# Altium PCB PCB1.PcbDoc
Units mil, origin at the board's own origin, x right, y up, seen from the top; angles counter-clockwise.
Board outline 5000 x 2500 mil, 2 copper layers (Top Layer, Bottom Layer); 38 components, 55 nets, 182 pads, 13 vias.
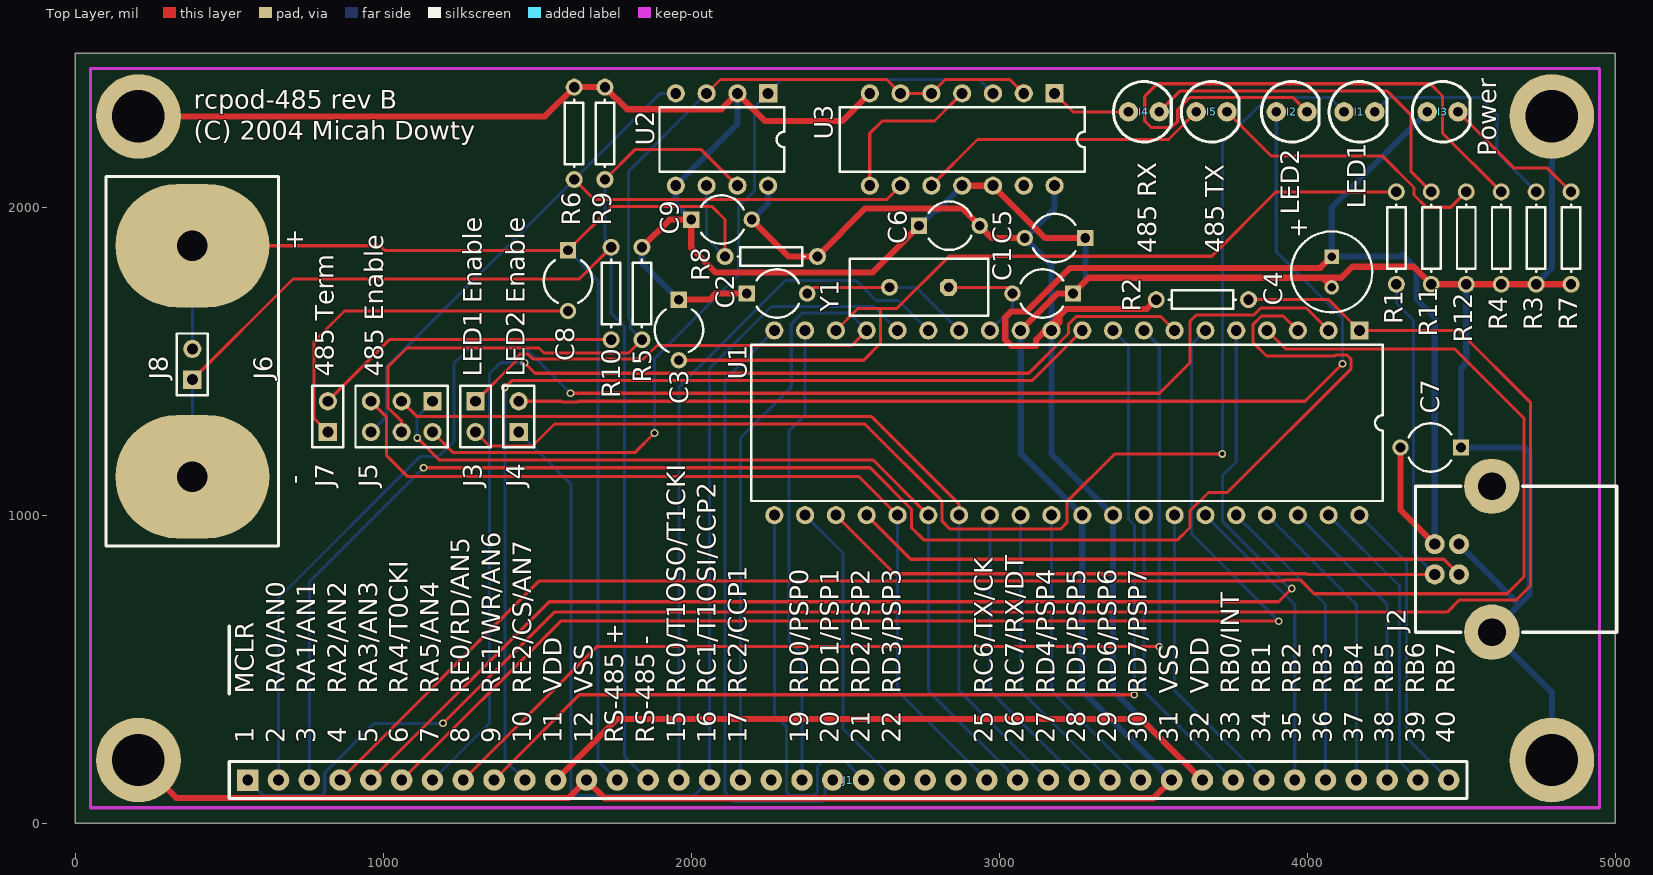
[diagram p0: Top Layer view]
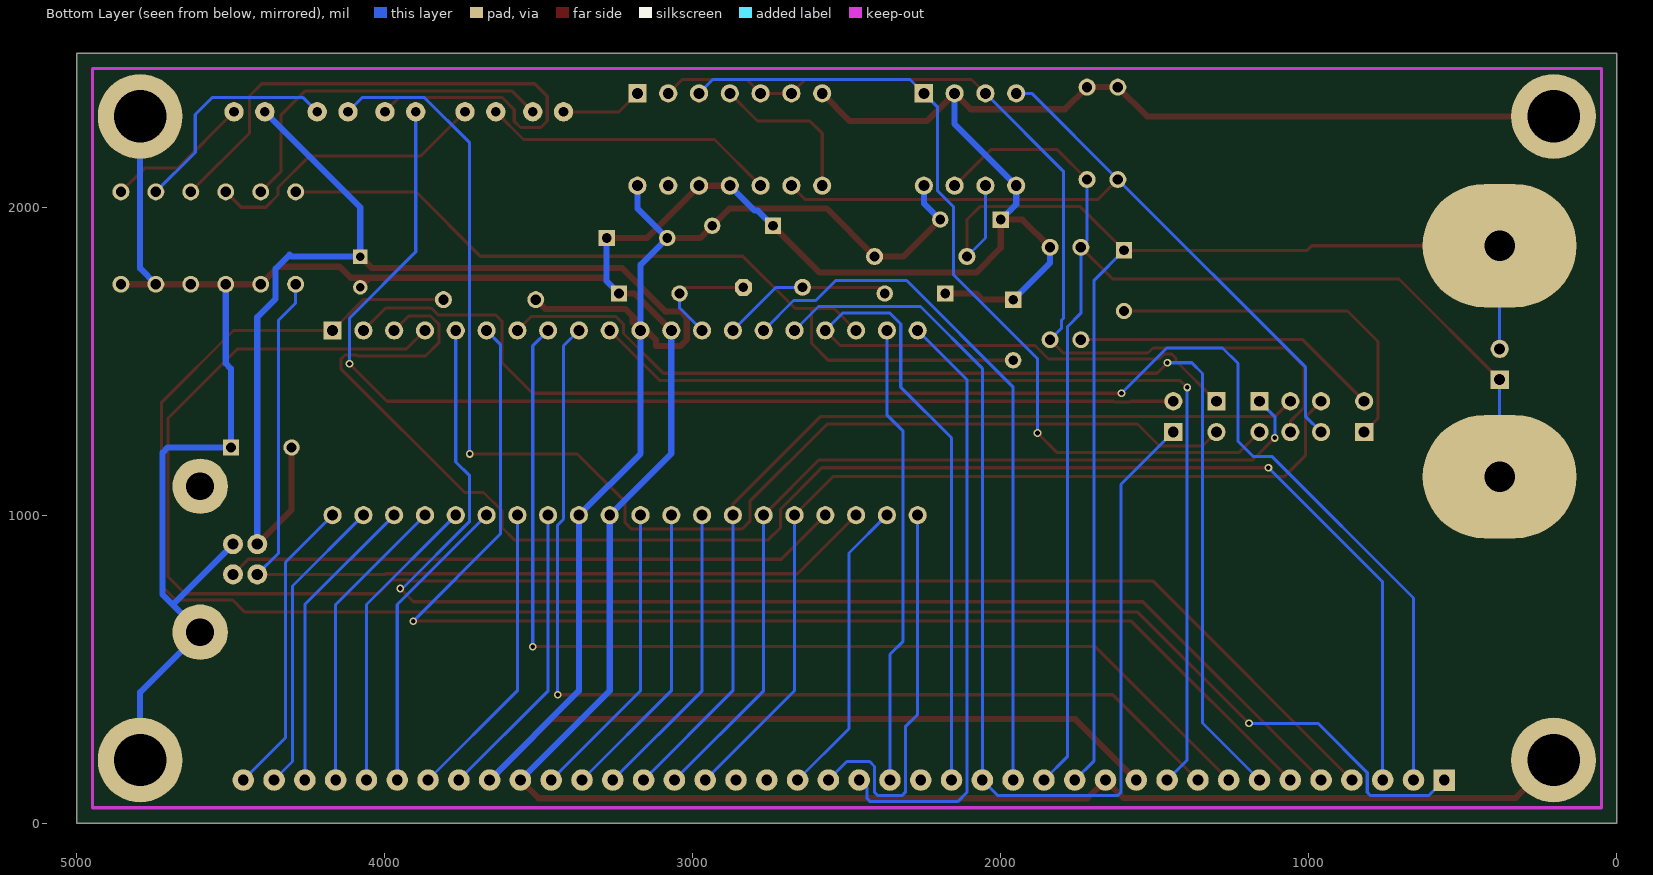
[diagram p1: Bottom Layer view, seen from below]

## Layer stack, top to bottom
Top Layer: signal copper 1.4
Dielectric: dielectric 12.6, FR-4, Dk 4.8
Bottom Layer: signal copper 1.4

## Board outline
0,0 5000,0 5000,2500 0,2500

## Design rules (kind name [scope] priority, off if disabled: settings)
Clearance [All] p1: gap=10
ComponentClearance [All] p1: gap=10 collisioncheckmode=0
PolygonConnect [All] p1: connectstyle=Relief reliefconductorwidth=10 reliefentries=4 polygonreliefangle="90 Angle"
RoomDefinition Sheet1 [InComponentClass('Sheet1')] p1: confinementstyle=ConfineIn formatcopy=TRUE outline 3940,6840 7320,6840 7320,7500 3940,7500
RoutingLayers [All] p1: top layer=Horizontal bottom layer=Vertical
RoutingVias [All] p1: holewidth=15 width=25 viastyle="Through Hole" minholewidth=15 minwidth=25 maxholewidth=15 maxwidth=25
SolderMaskExpansion [All] p1: expansion=4
TestPointUsage [All] p1: valid=0 allowmultiple=FALSE
Testpoint [All] p1: side=15 testpointundercomponent=TRUE minsize=40 maxsize=100 preferedsize=60 minholesize=0 maxholesize=40 preferedholesize=32 testpointgrid=1 style=1023 order=-539222988
Width Width_power [(InNet('VCC') or InNet('GND'))] p1: maxlimit=20 minlimit=10 preferedwidth=10 toplayer_minwidth=20 toplayer_prefwidth=20 bottomlayer_minwidth=20 bottomlayer_prefwidth=20 minimp=50.000000 maximp=50.000000 favimp=50.000000
Width [All] p2: maxlimit=10 minlimit=10 preferedwidth=10
16 further rules are at their usual default settings.

## Components (designator, comment, footprint, x,y, rotation, side; value= is the part's Value field where it differs from the comment)
C1 "Cap2" CAPR5-4X5 3240,1720 r180 top
C2 "Cap2" CAPR5-4X5 2180,1720 r0 top
C3 "" CAPR5-4X5 1960,1700 r270 top
C4 "10uF" CAP-EE-1 4080,1940 r90 top
C5 "" CAPR5-4X5 3280,1900 r180 top
C6 "" CAPR5-4X5 2740,1940 r0 top
C7 "" CAPR5-4X5 4500,1220 r180 top
C8 "" CAPR5-4X5 1600,1860 r270 top
C9 "" CAPR5-4X5 2000,1960 r0 top
I1 "LED1" LED-1-UNBROKE 4170,2310 r90 top
I2 "LED2" LED-1-UNBROKE 3950,2310 r90 top
I3 "Power" LED-1-UNBROKE 4440,2310 r90 top
I4 "485 RX" LED-1-UNBROKE 3470,2310 r90 top
I5 "485 TX" LED-1-UNBROKE 3690,2310 r90 top
J1 "GPIO" HR40 560,40 r90 top (schematic designator JP1)
J2 "USB" USB-TYPEB 4600,620 r90 top (schematic designator J1)
J3 "LED1 Enable" HDR1X2 1300,1370 r270 top
J4 "LED2 Enable" HDR1X2 1440,1270 r90 top
J5 "485 Enable" HDR2X3_NOTEXT 1160,1370 r180 top
J6 "RS-485" RS485J 380,1500 r90 top
J7 "485 Term" HDR1X2 820,1270 r90 top
J8 "RS-485" HDR1X2 380,1440 r90 top
R1 "Res1" AXIAL-0.3 4290,1900 r270 top
R2 "Res1" AXIAL-0.3 3660,1700 r180 top
R3 "Res1" AXIAL-0.3 4743.86,1900 r270 top
R4 "Res1" AXIAL-0.3 4630.39,1900 r270 top
R5 "Res1" AXIAL-0.3 1840,1720 r270 top
R6 "Res1" AXIAL-0.3 1620,2240 r270 top
R7 "" AXIAL-0.3 4857.32,1900 r270 top
R8 "" AXIAL-0.3 2260,1840 r180 top
R9 "" AXIAL-0.3 1720,2240 r90 top
R10 "" AXIAL-0.3 1740,1720 r90 top
R11 "" AXIAL-0.3 4403.46,1900 r270 top
R12 "" AXIAL-0.3 4516.93,1900 r270 top
U1 "PIC16C765" DIP-40 3220,1300 r180 top
U2 "MAX3082E" DIP-8 2100,2220 r180 top
U3 "MM74C02J" DIP-14 2880,2220 r180 top
Y1 "6 MHz" BCY-W2/E4.7 2740,1740 r180 top

## Footprints (in the part's own frame and the unit in brackets; to place one, negate y for a bottom-side part, rotate by r counter-clockwise, add the part's x,y. Pads: shape width x height; smd on the part's side, far side on the other; paste and mask are expansions set on the pad)
AXIAL-0.3 [mm]
  round 1.4 hole 0.85: 1(-3.81,0) 2(3.81,0)
  silkscreen extent -2.77,-0.76 2.77,0.76
BCY-W2/E4.7 [mm]
  oct 1.4x1.4 hole 0.8: 1(-2.44,0)
  round 1.4 hole 0.8: 2(2.44,0)
  silkscreen extent -5.7,-2.35 5.7,2.35
CAP-EE-1 [mm]
  rect 1.2x1.2 hole 0.7: 1(-2.54,0)
  round 1.2 hole 0.7: 2(-5.08,0)
  silkscreen extent -7.15,-3.34 -0.47,3.34
CAPR5-4X5 [mm]
  rect 1.35x1.35 hole 0.8: 1(0,0)
  round 1.35 hole 0.8: 2(5,0)
  silkscreen extent 0.81,-2 4.32,2
DIP-8 [mm]
  rect 1.5x1.5 hole 0.9: 1(-3.81,-3.81)
  round 1.5 hole 0.9: 2(-1.27,-3.81) 3(1.27,-3.81) 4(3.81,-3.81) 5(3.81,3.81) 6(1.27,3.81) 7(-1.27,3.81) 8(-3.81,3.81)
  silkscreen extent -5.15,-2.65 5.15,2.65
DIP-14 [mm]
  rect 1.5x1.5 hole 0.9: 1(-7.62,-3.81)
  round 1.5 hole 0.9: 2(-5.08,-3.81) 3(-2.54,-3.81) 4(0,-3.81) 5(2.54,-3.81) 6(5.08,-3.81) 7(7.62,-3.81) 8(7.62,3.81) 9(5.08,3.81) 10(2.54,3.81) 11(0,3.81) 12(-2.54,3.81) 13(-5.08,3.81) 14(-7.62,3.81)
  silkscreen extent -10.1,-2.65 10.1,2.65
DIP-40 [mm]
  rect 1.5x1.5 hole 0.9: 1(-24.13,-7.62)
  round 1.5 hole 0.9: 2(-21.59,-7.62) 3(-19.05,-7.62) 4(-16.51,-7.62) 5(-13.97,-7.62) 6(-11.43,-7.62) 7(-8.89,-7.62) 8(-6.35,-7.62) 9(-3.81,-7.62) 10(-1.27,-7.62) 11(1.27,-7.62) 12(3.81,-7.62) 13(6.35,-7.62) 14(8.89,-7.62) 15(11.43,-7.62) 16(13.97,-7.62) 17(16.51,-7.62) 18(19.05,-7.62) 19(21.59,-7.62) 20(24.13,-7.62) 21(24.13,7.62) 22(21.59,7.62) 23(19.05,7.62) 24(16.51,7.62) 25(13.97,7.62) 26(11.43,7.62) 27(8.89,7.62) 28(6.35,7.62) 29(3.81,7.62) 30(1.27,7.62) 31(-1.27,7.62) 32(-3.81,7.62) 33(-6.35,7.62) 34(-8.89,7.62) 35(-11.43,7.62) 36(-13.97,7.62) 37(-16.51,7.62) 38(-19.05,7.62) 39(-21.59,7.62) 40(-24.13,7.62)
  silkscreen extent -26.05,-6.45 26.05,6.45
HDR1X2 [mm]
  rect 1.5x1.5 hole 0.9: 1(0,0)
  round 1.5 hole 0.9: 2(2.54,0)
  silkscreen extent -1.27,-1.27 3.81,1.27
HDR2X3_NOTEXT [mm]
  rect 1.5x1.5 hole 0.9: 1(0,0)
  round 1.5 hole 0.9: 2(0,2.54) 3(2.54,0) 4(2.54,2.54) 5(5.08,0) 6(5.08,2.54)
  silkscreen extent -1.27,-1.27 6.35,3.81
HR40 [mil]
  rect 70x70 hole 35: 1(100,0)
  round 70 hole 35: 2(100,-100) 3(100,-200) 4(100,-300) 5(100,-400) 6(100,-500) 7(100,-600) 8(100,-700) 9(100,-800) 10(100,-900) 11(100,-1000) 12(100,-1100) 13(100,-1200) 14(100,-1300) 15(100,-1400) 16(100,-1500) 17(100,-1600) 18(100,-1700) 19(100,-1800) 20(100,-1900) 21(100,-2000) 22(100,-2100) 23(100,-2200) 24(100,-2300) 25(100,-2400) 26(100,-2500) 27(100,-2600) 28(100,-2700) 29(100,-2800) 30(100,-2900) 31(100,-3000) 32(100,-3100) 33(100,-3200) 34(100,-3300) 35(100,-3400) 36(100,-3500) 37(100,-3600) 38(100,-3700) 39(100,-3800) 40(100,-3900)
  silkscreen extent 40,-3960 600,60
LED-1-UNBROKE [mm]
  round 1.6 hole 0.8: 1(0,1.27) 2(0,-1.27)
  silkscreen extent -2.5,-2.27 2.5,2.5
RS485J [mil]
  oval 400x500 hole 100: 1(-375,0) 2(375,0)
  silkscreen extent -600,-280 600,280
USB-TYPEB [mil]
  round 65 hole 36.22: 1(286.22,185.43) 2(187.8,185.43) 3(187.8,106.69) 4(286.22,106.69)
  round 180 hole 90.55: 5(0,0) 5(474.02,0)
  silkscreen extent 0,-406 474,248

## Part data
C1 C2: "Capacitor"
C3 C5 C6 C7 C8 C9: library part Cap2, "Capacitor"
C4: library part "Cap Pol1", "Polarized Capacitor (Radial)"
I1: "Typical RED GaAs LED"
I2 I3 I4 I5: library part LED1, "Typical RED GaAs LED"
J1: library part MHDR2X20, "Header, 20-Pin, Dual row"
J2: library part "USB Type B", "Header, 4-Pin"
J3 J4 J6 J7 J8: library part MHDR1X2, "Header, 2-Pin"
J5: library part MHDR2X3, "Header, 3-Pin, Dual row"
R1 R2 R3 R4 R5 R6: "Resistor"
R7 R8 R9 R10 R11 R12: library part Res1, "Resistor"
U1: "EPROM-Based 8-Bit CMOS Microcontroller with USB"
U2: "+5V-Powered, RS-485 Driver/Receiver"
U3: library part MM74C00J, "Quad 2-Input NAND Gate"
Y1: library part XTAL, "Crystal Oscillator"

## Free pads (board coordinates)
  round 275 hole 170: 0(205,205) 0(205,2295) 0(4795,205) 0(4795,2295)

## Via types
v1: diameter 25, hole 15, Top Layer to Bottom Layer, 13 vias

## Nets (pads, with @x,y where several pads share a name; then routed paths per layer and width w, separated by ;. In a path a pad name is that pad's centre, name@x,y a point inside that pad or via, vN(x,y) a via of type N, cw(c..) or ccw(c..) an arc to the next point about the centre after c; other vN are vias at no path point)
GND: C1.1 C2.1 C3.1 C4.2 C5.1 C6.1 C7.1 C9.1 J1.12 J1.31 J2.4 J2.5@4600,620 pad.0 R3.2 R4.2 R5.1 R6.1 R7.2 R9.2 R11.2 R12.2 U1.12 U1.31 U2.2 U2.5 U3.7 U3.11 U3.12 | length 15309.7
  Top Layer w20: pad.0@205,205 328,82 1602,82 J1.12 1719,81 3501,81 J1.31 ; pad.0@205,2295 1525,2295 R6.1 R9.2 1792,2318 2098,2318 U2.2 2240,2280 2490,2280 U3.7 ; R5.1 1930,1960 C9.1 2000,1868 2080,1788 2588,1788 C6.1 ; C3.1 2060,1700 2080,1720 C2.1 ; U3.11 U3.12 3150,1900 C5.1 ; U1.12 3190,1720 C1.1 3291,1771 4049,1771 ; C4.2 4049,1771 ; R7.2 R3.2 R4.2 R12.2 R11.2 4346.46,1807 4147,1807 4111,1771 4080,1771 4049,1771
  Bottom Layer w20: R5.1 1840,1820 C3.1 ; C9.1 1950,2010 U2.5 2150,2270 U2.2 ; C6.1 2789,1989 2799,1989 U3.11 ; U1.12 3070,1200 U1.31 3270,430 J1.31 ; C1.1 3280,1760 C5.1 ; J2.4 4689.76,709.76 ; R12.2 4516.93,1492.93 4500,1476 C7.1 4705,1220 4722,1203 4722,742 4689.76,709.76 ; R3.2 4795,1801.14 pad.0@4795,2295 ; pad.0@4795,205 4795,425 4600,620 4689.76,709.76
NetC1_2: C1.2 U1.13 Y1.1 | length 365.7
  Top Layer w10: Y1.1 3023.15,1740 C1.2
  Bottom Layer w10: U1.13 3043.15,1673.15 C1.2
NetC2_2: C2.2 U1.14 Y1.2 | length 559.4
  Top Layer w10: C2.2 2396.85,1740 Y1.2
  Bottom Layer w10: Y1.2 2730,1740 U1.14
NetC3_2: C3.2 R1.1 U1.18 | length 2797.1
  Top Layer w10: C3.2 2560.15,1503.15 2615,1558 2615,1671 ; U1.18 2541,1671 2615,1671 ; R1.1 3899,2050 3690,1841 2838,1841 2668,1671 2615,1671
NetC8_1: C8.1 J1.13 J6.2 J8.2 R8.2 U2.6 | length 4308.6
  Top Layer w10: J6.2 990,1875 1005,1860 C8.1 1742,2002 2068,2002 2110,1960 R8.2
  Bottom Layer w10: J8.2 J6.2 ; C8.1 1697,1763 1697,203 J1.13 ; U2.6 2050,1900 R8.2
NetC8_2: C8.2 J7.1 | length 1178.7
  Top Layer w10: J7.1 775,1315 775,1564 874.15,1663.15 C8.2
NetI1_1: I1.1 J3.2 | length 4279.6
  Top Layer w10: J3.2 1345,1225 1485,1225 1556,1296 2564,1296 2815,1045 2815,980 2840,955 3200,955 3220,975 3220,1044 3375,1199 v1(3725,1199)
  Bottom Layer w10: v1(3725,1199) 3725,2209 3873,2357 4073,2357 I1.1
NetI1_2: I1.2 R3.1 | length 742.6
  Bottom Layer w10: I1.2 4267,2357 4560,2357 4616,2301 4616,2177.86 R3.1
NetI2_1: I2.1 J4.2 | length 3634.2
  Top Layer w10: J4.2 1578,1370 1580,1368 1633,1368 1635,1370 3993,1370 v1(4115,1492)
  Bottom Layer w10: I2.1 3900,1855 4115,1640 v1(4115,1492)
NetI2_2: I2.2 R4.1 | length 2088.4
  Top Layer w10: I2.2 3953,2357 3620,2357 3580,2317 3580,2279 3560,2259 3494,2259 3473,2280 3473,2360 3514,2401 4400,2401 4440,2361 4440,2240.39 R4.1
NetI3_2: I3.2 R7.1 | length 475
  Top Layer w10: I3.2 4673,2127 4780.32,2127 R7.1
NetI4_1: I4.1 U3.1 | length 264.9
  Top Layer w10: U3.1 3240,2310 I4.1
NetI4_2: I4.2 R11.1 | length 1154.2
  Top Layer w10: I4.2 3587,2377 4260,2377 4337,2300 4337,2116.46 R11.1
NetI5_1: I5.1 U3.10 | length 959.4
  Top Layer w10: U3.10 2930,2220 3550,2220 I5.1
NetI5_2: I5.2 R12.1 | length 940.1
  Top Layer w10: I5.2 3883,2167 4244,2167 4347,2064 4347,2039.93 4386.93,2000 4466.93,2000 R12.1
NetJ1_14: J1.14 J6.1 J8.1 R9.1 R10.2 U2.7 | length 4379.7
  Top Layer w10: J8.1 707,1767 1637,1767 R10.2 ; R9.1 1817,2187 2033,2187 U2.7
  Bottom Layer w10: J6.1 J8.1 ; R9.1 1720,1890 R10.2 1740,1655.56 1783,1612.56 1783,217 J1.14
NetJ2_2: J2.2 R1.2 U1.23 | length 3018
  Top Layer w10: U1.23 2660,810 3998,810 4000.2,807.8 J2.2
  Bottom Layer w10: R1.2 4290,1689 4345,1634 4345,877.36 J2.2
NetJ2_3: J2.3 U1.24 | length 2002.9
  Top Layer w10: U1.24 2713,857 4444.1,857 J2.3
NetJ5_2: J5.2 U2.1 U3.3 | length 2798.4
  Top Layer w10: J5.2 1227,1203 1817,1203 v1(1881,1267)
  Bottom Layer w10: v1(1881,1267) 1881,1508 2153,1780 2153,2001 2205,2053 2205,2325 U2.1 2295,2415 2935,2415 U3.3
NetJ5_4: J5.4 R5.2 U2.3 U3.2 U3.5 U3.6 | length 3131.9
  Top Layer w10: J5.4 1060,1305 1015,1350 1015,1481 1077,1543 1506,1543 1522,1527 1797,1527 R5.2 ; U2.3 2095,2415 2635,2415 U3.6 U3.5 2825,2415 3035,2415 U3.2
  Bottom Layer w10: R5.2 1803,1607 1803,1633 1797,1639 1797,2117 U2.3
NetJ5_6: J5.6 R6.2 U2.4 U3.9 | length 2644.9
  Top Layer w10: R6.2 1685,2025 2635,2025 U3.9
  Bottom Layer w10: J5.6 1010,1320 1010,1480 R6.2 1900,2370 U2.4
NetJ7_2: J7.2 R10.1 | length 1002.8
  Top Layer w10: J7.2 1020,1570 R10.1
NetU3_4: U3.4 U3.8 | length 523.8
  Top Layer w10: U3.8 2580,2240 2620,2280 2790,2280 U3.4
PIN1: J1.1 R2.1 U1.1 | length 6154.8
  Top Layer w10: v1(1194,324) 1555,685 4455,685 4495,725 4680,725 4725,770 4725,1367 4492,1600 U1.1 4070,1700 R2.1
  Bottom Layer w10: J1.1 610,90 800,90 810,100 810,164 970,324 v1(1194,324)
PIN2: J1.2 U1.2 | length 4770.5
  Top Layer w10: v1(1608,1396) 3521,1396 3620,1495 3620,1630 3640,1650 3826.71,1650 3849.71,1673 3997,1673 U1.2
  Bottom Layer w10: J1.2 660,731 1120,1191 1181,1191 1230,1240 1230,1493 1280,1543 1461,1543 v1(1608,1396)
PIN3: J1.3 U1.3 | length 5182.5
  Top Layer w10: v1(1131,1154) 2581,1154 2715,1020 2715,960 2755,920 3580,920 3620,960 3620,1014 3680,1074 3741,1074 4143,1476 4143,1506.5 4129.5,1520 4093,1520 4090,1517 3868,1517 3825,1560 3825,1620 3852,1647 3923,1647 U1.3
  Bottom Layer w10: J1.3 760,783 v1(1131,1154)
PIN4: J1.4 U1.4 | length 5622.5
  Top Layer w10: J1.4 1507,787 3923,787 3926,790 3977.5,790 4022.5,745 4649,745 4705,801 4705,1314 4479,1540 3930,1540 U1.4
PIN5: J1.5 U1.5 | length 4201.6
  Top Layer w10: J1.5 1539,719 3907,719 v1(3950,762)
  Bottom Layer w10: U1.5 3770,1173 3725,1128 3725,980 3943,762 v1(3950,762)
PIN6: J1.6 U1.6 | length 4141.6
  Top Layer w10: J1.6 1576,656 v1(3908,656)
  Bottom Layer w10: U1.6 3625,1555 3625,939 v1(3908,656)
PIN7: J1.7 U1.7 | length 3762.6
  Top Layer w10: v1(1459,1495) 1493,1461 3096,1461 3225,1590 3225,1620 3250,1645 3525,1645 U1.7
  Bottom Layer w10: J1.7 1345,325 1345,1460 1380,1495 v1(1459,1495)
PIN8: J1.8 U1.8 | length 3487.1
  Top Layer w10: J1.8 1693,573 v1(3520,573)
  Bottom Layer w10: U1.8 3520,1550 v1(3520,573)
PIN9: J1.9 U1.9 | length 3405.3
  Top Layer w10: J1.9 1637,417 v1(3439,417)
  Bottom Layer w10: U1.9 3420,1550 3420,987 3439,968 v1(3439,417)
PIN10: J1.10 U1.10 | length 3253.6
  Top Layer w10: v1(1395,1415) 1417,1437 3107,1437 U1.10
  Bottom Layer w10: v1(1395,1415) 1395,205 J1.10
PIN15: J1.15 U1.15 | length 2296.4
  Bottom Layer w10: J1.15 1960,1416 2306,1762 2536,1762 2601,1697 2673,1697 U1.15
PIN16: J1.16 J4.1 U1.16 | length 3777.8
  Bottom Layer w10: J4.1 1610,1100 1610,100 1620,90 2010,90 J1.16 2060,1477 2261,1678 2592,1678 U1.16
PIN17: J1.17 J3.1 U1.17 | length 3215.8
  Top Layer w10: J3.1 1431,1501 1431,1510 1444,1523 1470,1523 1486,1507 1845,1507 1889,1551 2521,1551 U1.17
  Bottom Layer w10: J1.17 2160,1251 2325,1416 2325,1621 2360,1656 2514,1656 U1.17
PIN19: J1.19 U1.19 | length 1499.8
  Bottom Layer w10: J1.19 2360,548 2317,591 2317,1273 2370,1326 U1.19
PIN20: J1.20 U1.20 | length 1977.6
  Bottom Layer w10: U1.20 2110,1440 2110,100 2140,70 2424,70 2434,80 2434,114 J1.20
PIN21: J1.21 U1.21 | length 1290.3
  Bottom Layer w10: U1.21 2270,353 2310,313 2310,100 2320,90 2400,90 2410,100 2410,184 2426,200 2500,200 J1.21
PIN22: J1.22 U1.22 | length 980.1
  Bottom Layer w10: U1.22 2493,877 2493,307 J1.22
PIN25: J1.25 J5.5 U1.25 | length 2916.6
  Top Layer w10: J5.5 1010,1320 1010,1195 1080,1125 2545,1125 U1.25
  Bottom Layer w10: U1.25 2670,430 J1.25
PIN26: J1.26 J5.1 U1.26 | length 2883.8
  Top Layer w10: v1(1110,1251) 1182,1179 2591,1179 U1.26
  Bottom Layer w10: v1(1110,1251) 1110,1320 J5.1 ; U1.26 2770,430 J1.26
PIN27: J1.27 J5.3 U1.27 | length 2964.5
  Top Layer w10: J5.3 1110,1320 2586,1320 2870,1036 U1.27
  Bottom Layer w10: U1.27 2870,430 J1.27
PIN28: J1.28 U1.28 | length 980.1
  Bottom Layer w10: U1.28 2970,430 J1.28
PIN29: J1.29 U1.29 | length 980.1
  Bottom Layer w10: U1.29 3070,430 J1.29
PIN30: J1.30 U1.30 | length 980.1
  Bottom Layer w10: U1.30 3170,430 J1.30
PIN33: J1.33 U1.33 | length 980.1
  Bottom Layer w10: U1.33 3470,430 J1.33
PIN34: J1.34 U1.34 | length 980.1
  Bottom Layer w10: U1.34 3570,430 J1.34
PIN35: J1.35 U1.35 | length 980.1
  Bottom Layer w10: U1.35 3960,710 J1.35
PIN36: J1.36 U1.36 | length 980.1
  Bottom Layer w10: U1.36 4060,710 J1.36
PIN37: J1.37 U1.37 | length 980.1
  Bottom Layer w10: U1.37 4160,710 J1.37
PIN38: J1.38 U1.38 | length 980.1
  Bottom Layer w10: U1.38 4260,710 J1.38
PIN39: J1.39 U1.39 | length 980.1
  Bottom Layer w10: U1.39 4300,770 4300,200 J1.39
PIN40: J1.40 U1.40 | length 980.1
  Bottom Layer w10: U1.40 4323,847 4323,277 J1.40
VCC: C4.1 C5.2 C6.2 C7.2 C9.2 I3.1 J1.11 J1.32 J2.1 R2.2 R8.1 U1.11 U1.32 U2.8 U3.14 | length 9662.6
  Top Layer w20: J1.11 1758,338 3462,338 J1.32 ; C9.2 2316.85,1840 R8.1 2566,1996 2880.85,1996 C6.2 2976.85,1900 C5.2 ; U1.11 3196,1626 3196,1646 ; R2.2 3480,1670 3220,1670 3196,1646 ; C4.1 4043,1803 3230.57,1803 3089.57,1662 3040,1662 3020,1642 3020,1570 3040,1550 3120,1550 3120,1570 3160,1610 3196,1646 ; C7.2 4303.15,1017.64 J2.1
  Bottom Layer w20: C9.2 2250,2013.15 U2.8 ; U3.14 3180,1996.85 C5.2 3170,1813.15 U1.11 3170,1200 U1.32 3370,430 J1.32 ; I3.1 4080,2000 C4.1 4303.15,1840 4309.53,1846.38 4355,1800.9 4355,1702.9 4414.57,1643.34 J2.1
pads on no net: J1.18 J1.23 J1.24 J2.5@4600,1094.02 U3.13

## Keep-outs
Keep-Out Layer:
  lines w10: 50,50 4950,50 4950,2450 50,2450 50,50

## Silkscreen, mask and mechanical layers (free items; w line width, h text height)
Top Overlay:
  text "rcpod-485 rev B" at 385,2320 h60
  text "(C) 2004 Micah Dowty" at 385,2220 h60
Mechanical 1:
  the board outline again, w10

## Text inside footprints (layer, text, board x,y; h text height)
C4: Top Overlay "+" at 4000,1900 h59.06 r90
J1: Top Overlay "RS-485 -" at 1880,260 h60 r90; Top Overlay "RS-485 +" at 1780,260 h60 r90; Top Overlay "36" at 4080,260 h60 r90; Top Overlay "40" at 4480,260 h60 r90; Top Overlay "39" at 4380,260 h60 r90; Top Overlay "38" at 4280,260 h60 r90; Top Overlay "37" at 4180,260 h60 r90; Top Overlay "35" at 3980,260 h60 r90; Top Overlay "34" at 3880,260 h60 r90; Top Overlay "33" at 3780,260 h60 r90; Top Overlay "32" at 3680,260 h60 r90; Top Overlay "31" at 3580,260 h60 r90; Top Overlay "30" at 3480,260 h60 r90; Top Overlay "29" at 3380,260 h60 r90; Top Overlay "28" at 3280,260 h60 r90; Top Overlay "27" at 3180,260 h60 r90; Top Overlay "26" at 3080,260 h60 r90; Top Overlay "25" at 2980,260 h60 r90; Top Overlay "22" at 2680,260 h60 r90; Top Overlay "21" at 2580,260 h60 r90; Top Overlay "20" at 2480,260 h60 r90; Top Overlay "19" at 2380,260 h60 r90; Top Overlay "17" at 2180,260 h60 r90; Top Overlay "15" at 1980,260 h60 r90; Top Overlay "16" at 2080,260 h60 r90; Top Overlay "12" at 1680,260 h60 r90; Top Overlay "11" at 1580,260 h60 r90; Top Overlay "10" at 1480,260 h60 r90; Top Overlay "9" at 1380,260 h60 r90; Top Overlay "8" at 1280,260 h60 r90; Top Overlay "7" at 1180,260 h60 r90; Top Overlay "6" at 1080,260 h60 r90; Top Overlay "5" at 980,260 h60 r90; Top Overlay "4" at 880,260 h60 r90; Top Overlay "3" at 780,260 h60 r90; Top Overlay "2" at 680,260 h60 r90; Top Overlay "1" at 580,260 h60 r90; Top Overlay "RB3" at 4080,420 h60 r90; Top Overlay "RB7" at 4480,420 h60 r90; Top Overlay "RB6" at 4380,420 h60 r90; Top Overlay "RB5" at 4280,420 h60 r90; Top Overlay "RB4" at 4180,420 h60 r90; Top Overlay "RB2" at 3980,420 h60 r90; Top Overlay "RB1" at 3880,420 h60 r90; Top Overlay "RB0/INT" at 3780,420 h60 r90; Top Overlay "VDD" at 3680,420 h60 r90; Top Overlay "VSS" at 3580,420 h60 r90; Top Overlay "RD7/PSP7" at 3480,420 h60 r90; Top Overlay "RD6/PSP6" at 3380,420 h60 r90; Top Overlay "RD5/PSP5" at 3280,420 h60 r90; Top Overlay "RD4/PSP4" at 3180,420 h60 r90; Top Overlay "RC7/RX/DT" at 3080,420 h60 r90; Top Overlay "RC6/TX/CK" at 2980,420 h60 r90; Top Overlay "RD3/PSP3" at 2680,420 h60 r90; Top Overlay "RD2/PSP2" at 2580,420 h60 r90; Top Overlay "RD1/PSP1" at 2480,420 h60 r90; Top Overlay "RD0/PSP0" at 2380,420 h60 r90; Top Overlay "RC2/CCP1" at 2180,420 h60 r90; Top Overlay "RC0/T1OSO/T1CKI" at 1980,420 h60 r90; Top Overlay "VSS" at 1680,420 h60 r90; Top Overlay "VDD" at 1580,420 h60 r90; Top Overlay "RE2/CS/AN7" at 1480,420 h60 r90; Top Overlay "RE1/WR/AN6" at 1380,420 h60 r90; Top Overlay "RE0/RD/AN5" at 1280,420 h60 r90; Top Overlay "RA5/AN4" at 1180,420 h60 r90; Top Overlay "RA4/T0CKI" at 1080,420 h60 r90; Top Overlay "RA3/AN3" at 980,420 h60 r90; Top Overlay "RA2/AN2" at 880,420 h60 r90; Top Overlay "RA1/AN1" at 780,420 h60 r90; Top Overlay "RA0/AN0" at 680,420 h60 r90; Top Overlay "MCLR" at 580,420 h60 r90; Top Overlay "RC1/T1OSI/CCP2" at 2080,420 h60 r90
J6: Top Overlay "+" at 740,1860 h60 r90; Top Overlay "-" at 740,1100 h60 r90